# Altium PCB PCB1.PcbDoc
Units mm, origin at the board's own origin, x right, y up, seen from the top; angles counter-clockwise.
Board outline 152.4 x 101.6 mm, 2 copper layers (Top Layer, Bottom Layer); 24 components, 14 nets, 78 pads, 28 vias.
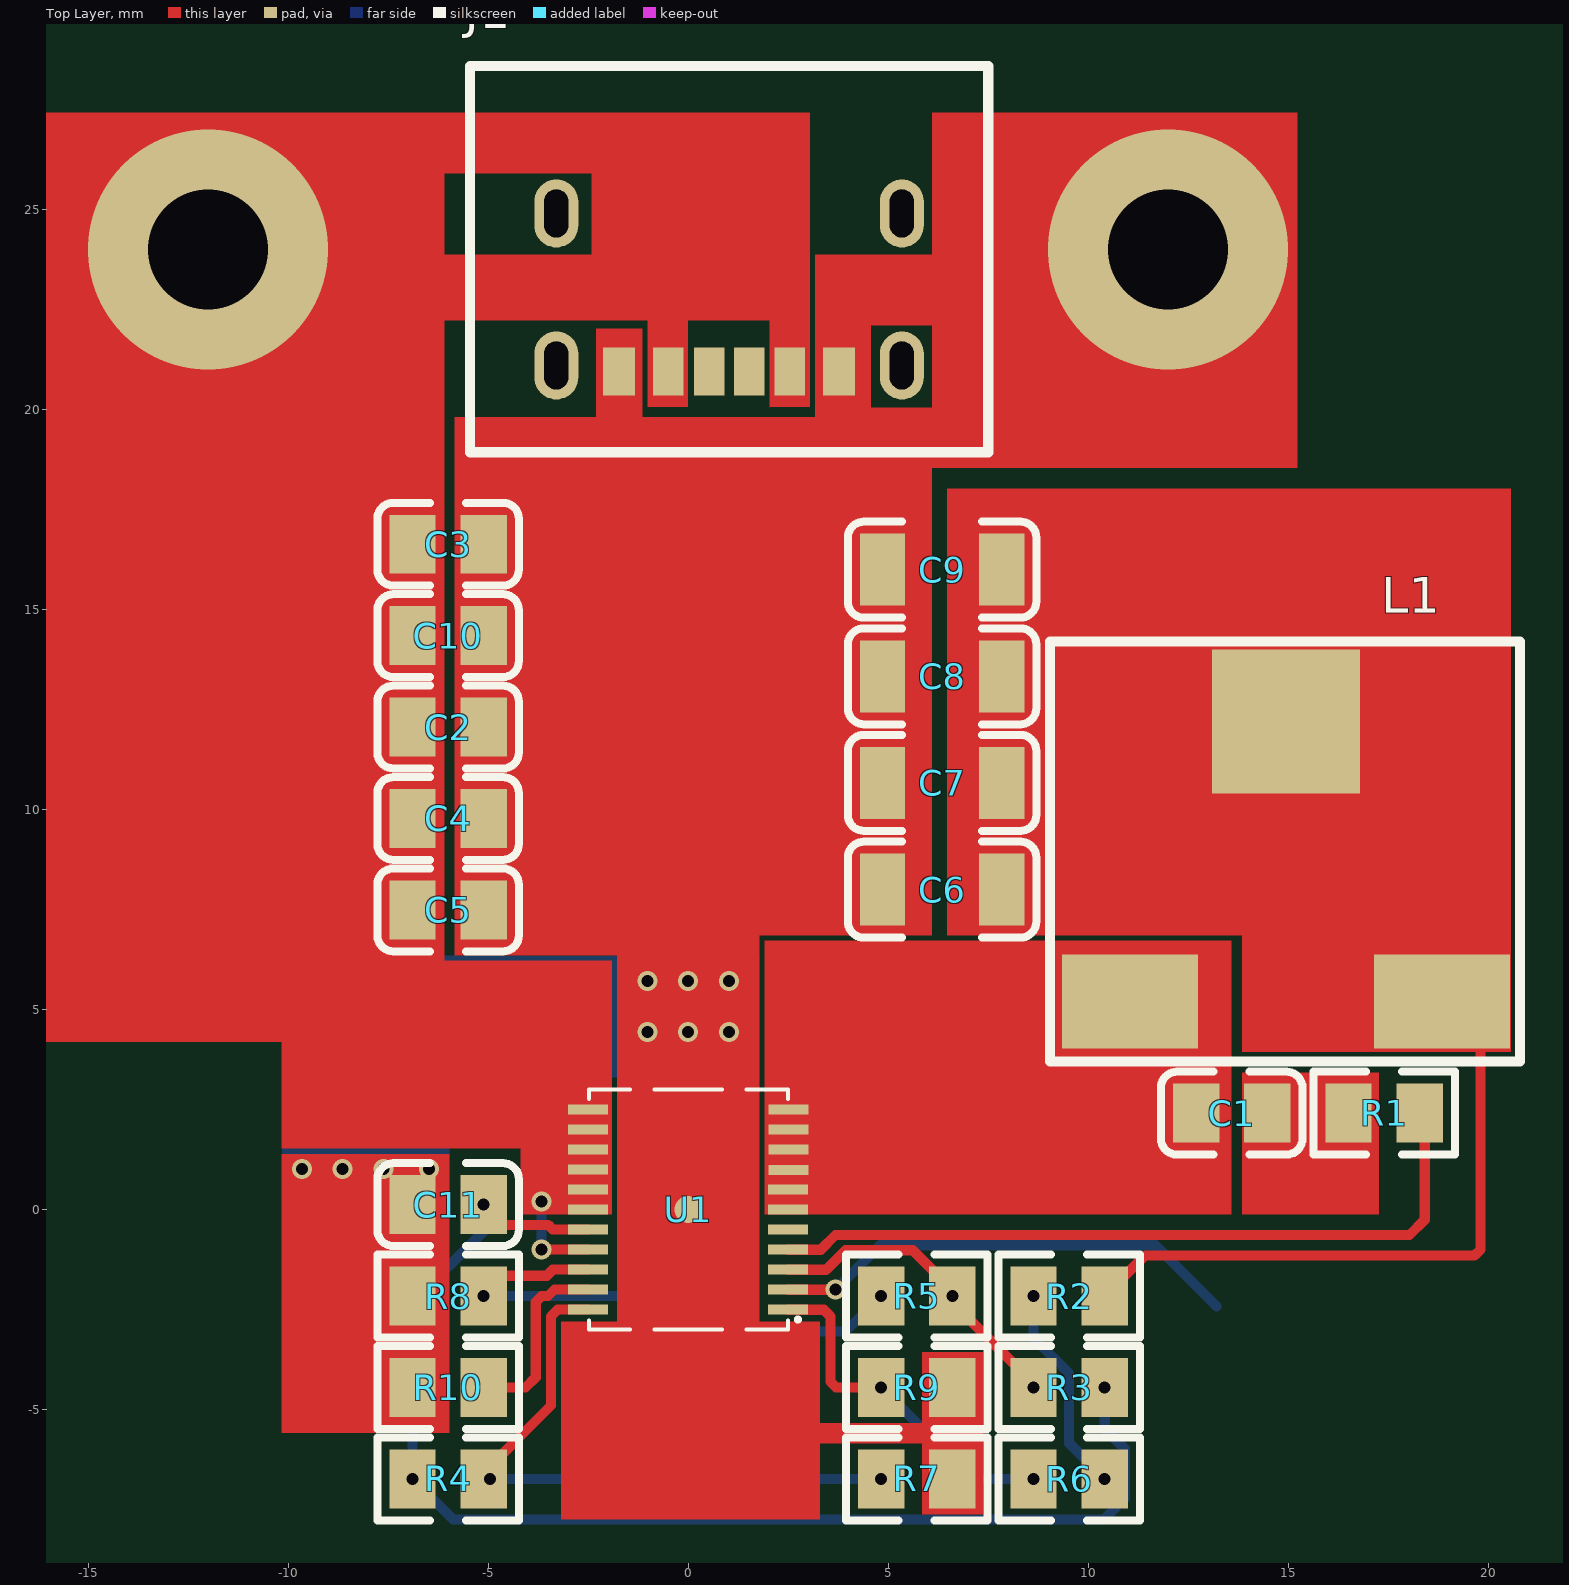
[diagram p0: Top Layer view]
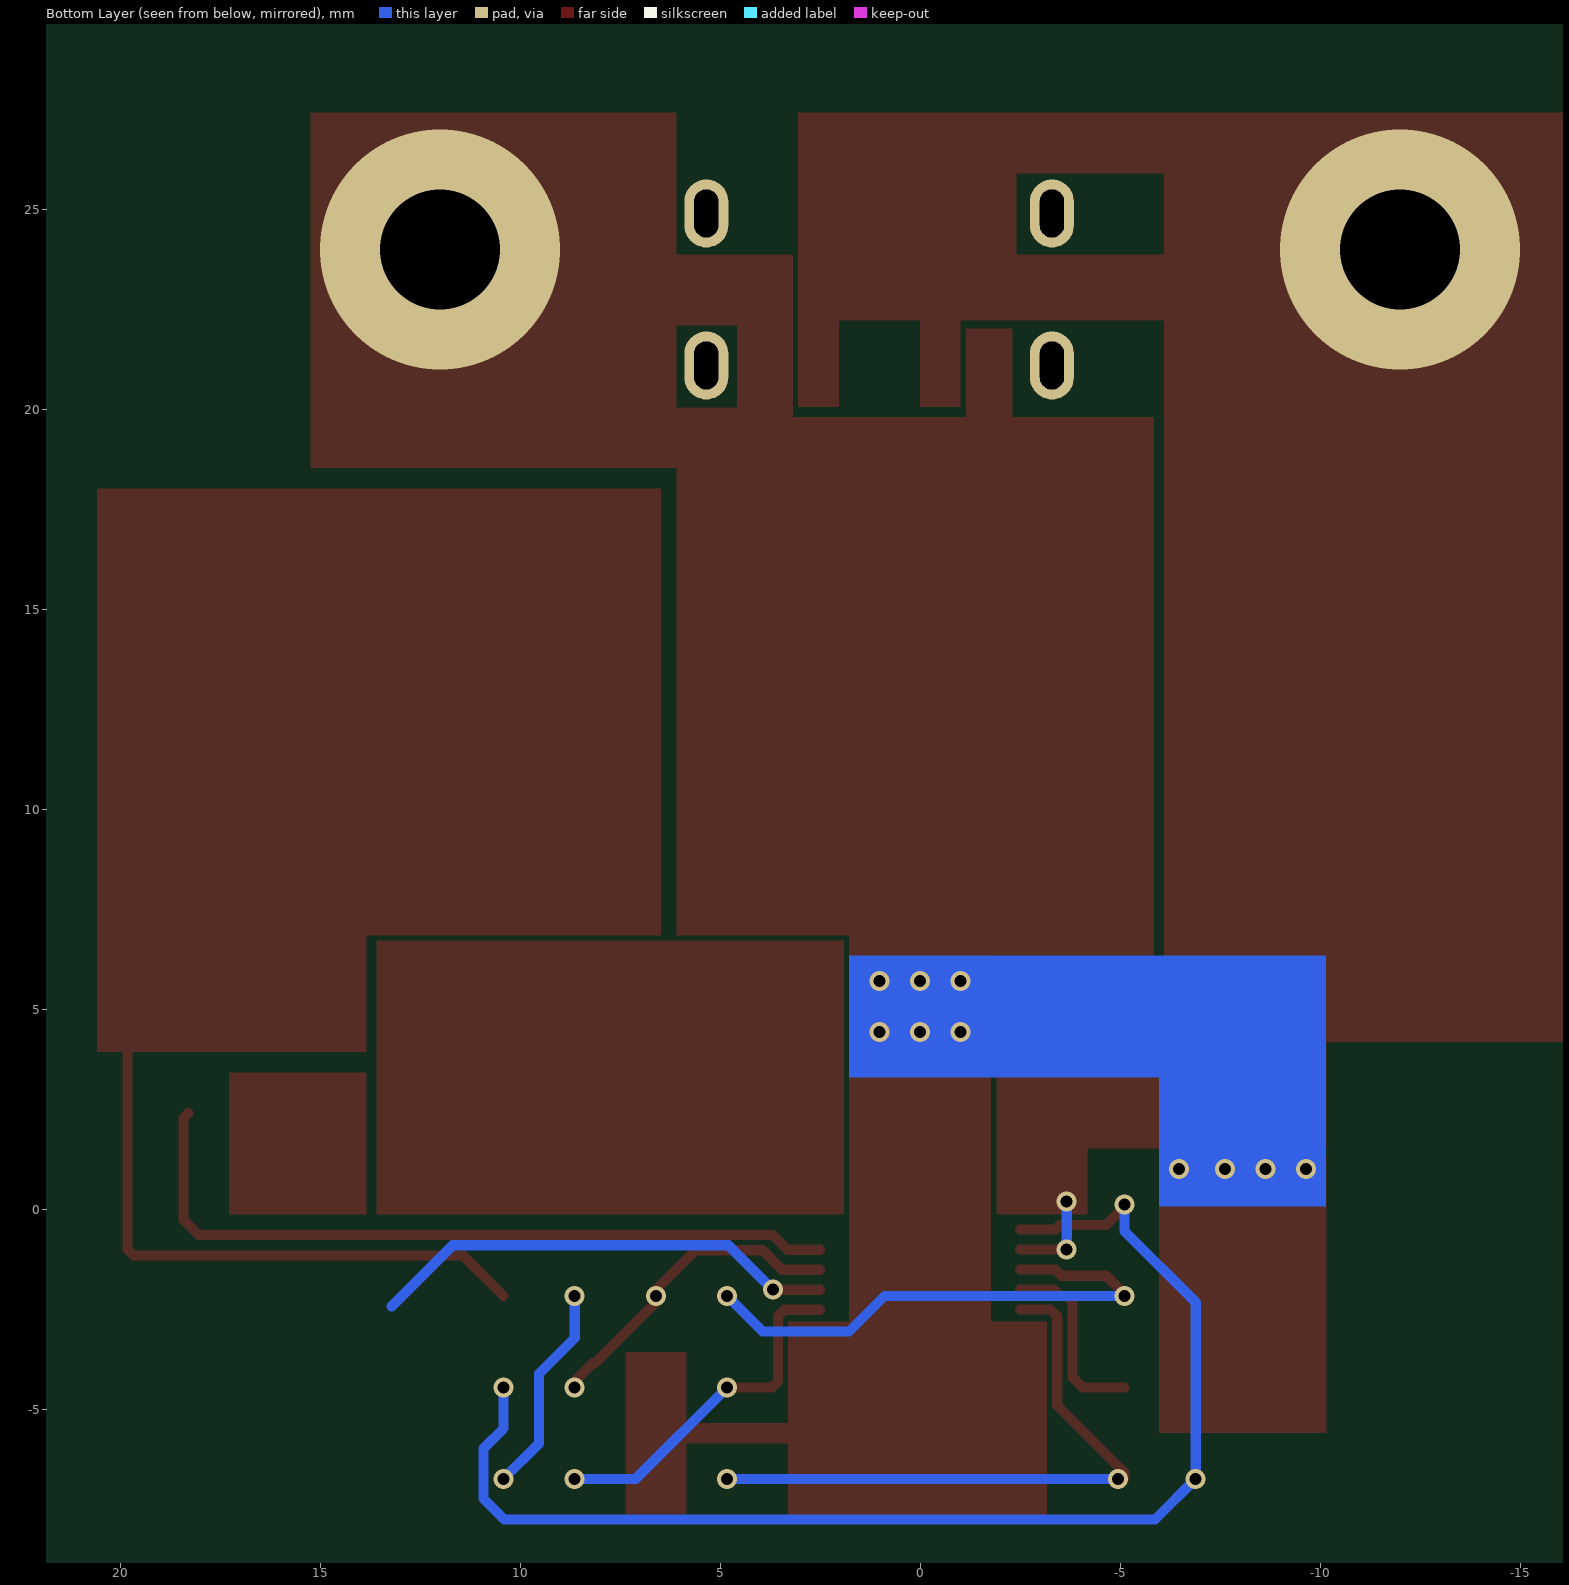
[diagram p1: Bottom Layer view, seen from below]
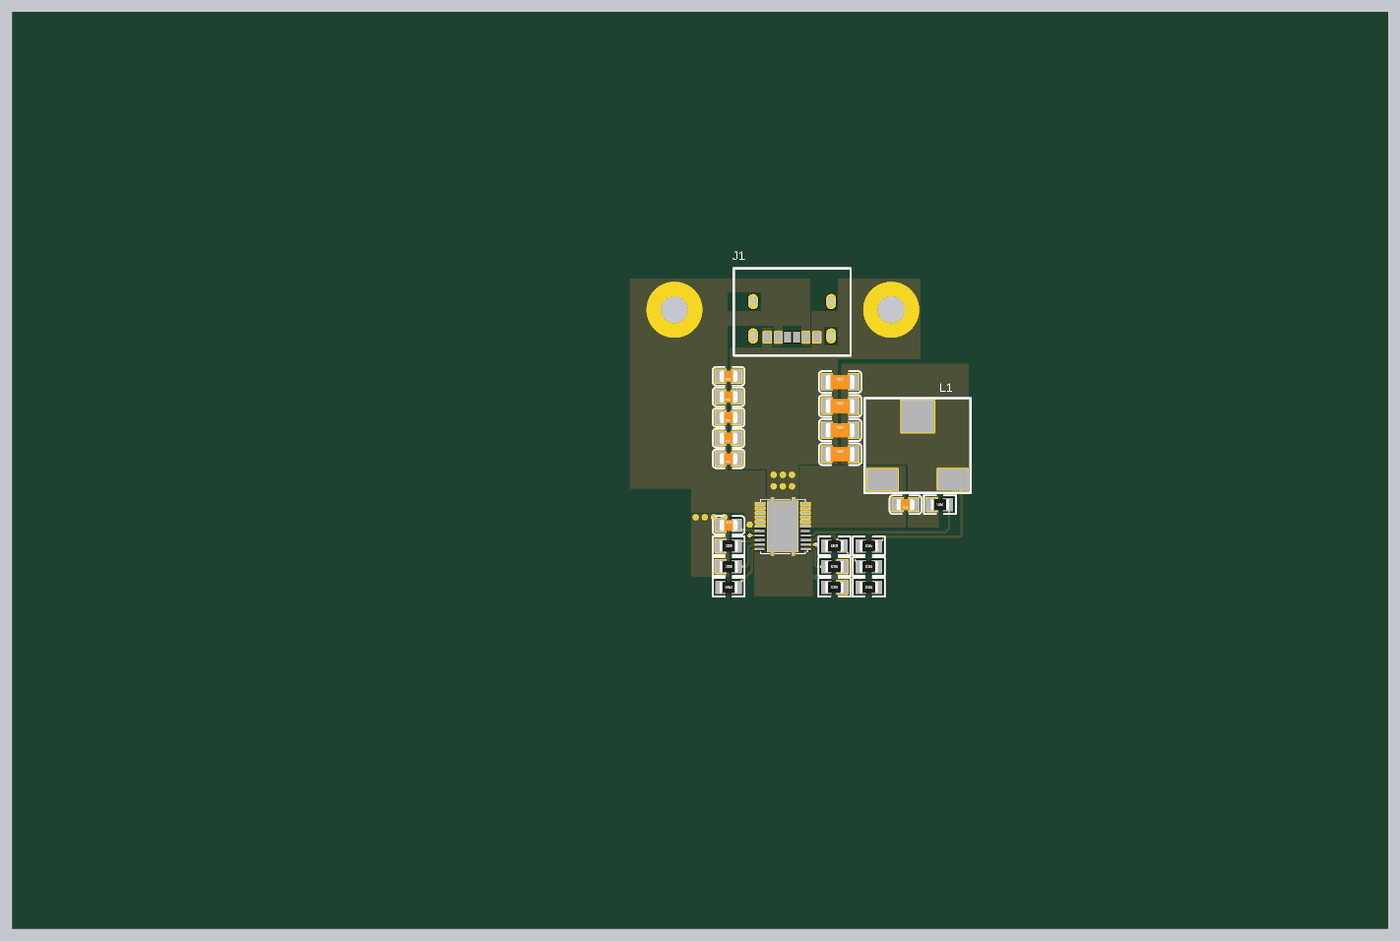
[diagram p2: 3D render of the assembled board from above, using the file's embedded part models]

## Layer stack, top to bottom
Top Solder: solder mask 0.0102, Solder Resist, Dk 3.5
Top Layer: signal copper 0.0356
Dielectric 1: dielectric 0.32, FR-4, Dk 4.8
Bottom Layer: signal copper 0.0356
Bottom Solder: solder mask 0.0102, Solder Resist, Dk 3.5

## Board outline
-85.344,-44.577 67.056,-44.577 67.056,57.023 -85.344,57.023

## Design rules (kind name [scope] priority, off if disabled: settings)
Clearance [All] p1: gap=0.127 ignorepadtopadclearanceinfootprint=FALSE
PolygonConnect [All] p1: connectstyle=Relief reliefconductorwidth=0.254 reliefentries=4 polygonreliefangle="90 Angle" airgapwidth=0.254
RoutingVias [All] p1: holewidth=0.711 width=1.27 viastyle="Through Hole" minholewidth=0.711 minwidth=1.27 maxholewidth=0.711 maxwidth=1.27
SolderMaskExpansion [All] p1: expansion=0.102 istentingtop=FALSE
SupplyNets "Schematic Supply Nets_3" [InNet('1V0')] p1: voltage=0.000
SupplyNets "Schematic Supply Nets_2" [InNet('VIN')] p2: voltage=0.000
SupplyNets "Schematic Supply Nets_1" [InNet('GND')] p3: voltage=0.000
SupplyNets "Schematic Supply Nets" [InNet('VREG')] p4: voltage=0.000
Width [All] p1: maxlimit=25.4 minlimit=0.127 preferedwidth=0.254
30 further rules are at their usual default settings.

## Classes and differential pairs
component class Sheet1: C1 C2 C3 C4 C5 C8 C9 C10 C11 J1 L1 R1 R2 R3 R4 R5 R6 R7 R8 R9 R10 U1

## Components (designator, comment, footprint, x,y, rotation, side; value= is the part's Value field where it differs from the comment)
C1 "100nF" 0805_C 13.589,2.413 r180 top
C2 "22uF" 0805_C -6,12.065 r180 top
C3 "22uF" 0805_C -6,16.637 r180 top
C4 "22uF" 0805_C -6,9.779 r180 top
C5 "22uF" 0805_C -6,7.493 r180 top
C6 "100uF" 1206_C 6.35,8.001 r0 top
C7 "100uF" 1206_C 6.35,10.668 r0 top
C8 "100uF" 1206_C 6.35,13.335 r0 top
C9 "100uF" 1206_C 6.35,16.002 r0 top
C10 "4.7uF" 0805_C -6,14.351 r180 top
C11 "1uF" 0805_C -6,0.127 r0 top
J1 "Type C 6 pin" "USB type C 6pin" 5.344,24.905 r180 top locked
L1 "Inductor" "PCBComponent_1 - duplicate2" 11.049,5.207 r0 top locked value=0.44uH
R1 "2Ω" 0805_R 17.399,2.413 r180 top
R2 "3.3KΩ" 0805_R 9.525,-2.159 r180 top
R3 "100KΩ" 0805_R 9.525,-4.445 r180 top
R4 "NC" 0805_R -6,-6.731 r180 top
R5 "200KΩ" 0805_R 5.714,-2.159 r0 top
R6 "4.7KΩ" 0805_R 9.524,-6.731 r180 top
R7 "NC" 0805_R 5.715,-6.731 r180 top
R8 "39KΩ" 0805_R -6,-2.159 r0 top
R9 "12KΩ" 0805_R 5.714,-4.445 r180 top
R10 "150KΩ" 0805_R -6,-4.445 r0 top
U1 "TPS53355DQPR" LSON-22_L6.0-W5.0-P0.50-BL-EP 0,0 r90 top locked

## Footprints (in the part's own frame and the unit in brackets; to place one, negate y for a bottom-side part, rotate by r counter-clockwise, add the part's x,y. Pads: shape width x height; smd on the part's side, far side on the other; paste and mask are expansions set on the pad)
0805_C [mm]
  rect 1.16x1.47 smd: 1(-0.89,0) 2(0.89,0)
  silkscreen extent -1.77,-1.04 1.77,1.04, body extent -1,-0.62 1,0.63, height 0.77
0805_R [mm]
  rect 1.16x1.47 smd: 1(-0.89,0) 2(0.89,0)
  silkscreen extent -1.77,-1.04 1.77,1.03, body extent -1,-0.62 1,0.63, height 0.49
1206_C [mm]
  rect 1.13x1.8 smd: 1(-1.49,0) 2(1.49,0)
  silkscreen extent -2.36,-1.2 2.35,1.2, body extent -1.6,-0.81 1.6,0.79, height 1
LSON-22_L6.0-W5.0-P0.50-BL-EP [mm]
  rect 0.25x1 smd: 1(-2.502,-2.502) 2(-2.002,-2.502) 3(-1.502,-2.502) 4(-1.002,-2.502) 5(-0.502,-2.502) 6(-0.002,-2.502) 7(0.498,-2.502) 8(0.996,-2.509) 9(1.499,-2.506) 10(1.998,-2.508) 11(2.498,-2.508) 12(2.502,2.509) 13(2.001,2.505) 14(1.501,2.504) 15(1.002,2.504) 16(0.501,2.504) 17(0.002,2.505) 18(-0.498,2.505) 19(-0.998,2.505) 20(-1.5,2.502) 21(-1.998,2.503) 22(-2.498,2.505)
  round 0.68 smd: 23(0.005,0)
  Top Layer region: -2.796,-1.6 -2.796,-1.3 -3.196,-1.3 -3.196,-1 -2.796,-1 -2.796,1 -3.196,1 -3.196,1.3 -2.796,1.3 -2.796,1.7 2.804,1.7 2.804,1.3 3.204,1.3 3.204,1 2.804,1 2.804,-1 3.204,-1 3.204,-1.3 2.804,-1.3 2.804,-1.7 -2.796,-1.7 -2.796,-1.6
  silkscreen extent -3,-2.79 3,2.48
"PCBComponent_1 - duplicate2" [mm] "大电流电感"
  rect 3.7x3.6 smd: 0(3.9,7)
  rect 3.4x2.35 smd: 1(0,0) 2(7.8,0)
  silkscreen extent -2,-1.5 9.75,9
"USB type C 6pin" [mm] "充电用6针接口"
  oval 1.1x1.7 hole 0.6 slot 1.2 at 90 deg: 7(0,3.8) 8(8.64,3.8) 9(0,0) 10(8.64,0)
  rect 0.76x1.2 smd: A5(3.82,3.95) A9(2.8,3.95) B5(4.82,3.95) B9(5.84,3.95)
  rect 0.8x1.2 smd: A12(1.57,3.95) B12(7.07,3.95)
  silkscreen extent -2.16,-3.68 10.79,5.97

## Part data
C1: library part "0805 100nF(104) 10% 50V", "贴片电容", Package=0805, SuppliersPartNumber=C49678, ComponentLink1Description=供应商链接, ComponentLink1URL=http://www.szlcsc.com/product/details_50686.html, Supplier=LC
C2 C3 C4 C5: library part "0805 22uF (226) 20% 25V", "贴片电容", Package=0805, SuppliersPartNumber=C45783, ComponentLink1Description=供应商链接, ComponentLink1URL=http://www.szlcsc.com/product/details_46786.html, Supplier=LC
C6 C7 C8 C9: library part "1206 100nF (104) 10% 50V", "贴片电容", Package=1206, SuppliersPartNumber=C24497, ComponentLink1Description=供应商链接, ComponentLink1URL=http://www.szlcsc.com/product/details_25237.html, Supplier=LC
C10: library part "0805 4.7uF (475) 10% 25V", "贴片电容", Package=0805, SuppliersPartNumber=C1779, ComponentLink1Description=供应商链接, ComponentLink1URL=http://www.szlcsc.com/product/details_2131.html, Supplier=LC
C11: library part "0805 1uF (105) 10% 50V", "贴片电容", Package=0805, SuppliersPartNumber=C28323, ComponentLink1Description=供应商链接, ComponentLink1URL=http://www.szlcsc.com/product/details_29074.html, Supplier=LC
R1: library part "0805 2.2Ω (2R20) 1%", "贴片电阻", Package=0805, SuppliersPartNumber=C17521, ComponentLink1Description=供应商链接, ComponentLink1URL=http://www.szlcsc.com/product/details_18209.html, Supplier=LC
R2: library part "0805 3.3KΩ (3301) 1%", "贴片电阻", Package=0805, SuppliersPartNumber=C26010, ComponentLink1Description=供应商链接, ComponentLink1URL=http://www.szlcsc.com/product/details_26753.html, Supplier=LC
R3: library part "0805 100KΩ (1003) 1%", "贴片电阻", Package=0805, SuppliersPartNumber=C17407, ComponentLink1Description=供应商链接, ComponentLink1URL=http://www.szlcsc.com/product/details_18095.html, Supplier=LC
R4 R7 R8: library part "0805 39KΩ (3902) 1%", "贴片电阻", Package=0805, SuppliersPartNumber=C25826, ComponentLink1Description=供应商链接, ComponentLink1URL=http://www.szlcsc.com/product/details_26569.html, Supplier=LC
R5: library part "0805 200KΩ (2003) 1%", "贴片电阻", Package=0805, SuppliersPartNumber=C17539, ComponentLink1Description=供应商链接, ComponentLink1URL=http://www.szlcsc.com/product/details_18227.html, Supplier=LC
R6: library part "0805 4.7KΩ (4701) 1%", "贴片电阻", Package=0805, SuppliersPartNumber=C17673, ComponentLink1Description=供应商链接, ComponentLink1URL=http://www.szlcsc.com/product/details_18361.html, Supplier=LC
R9: library part "0805 12KΩ (1202) 1%", "贴片电阻", Package=0805, SuppliersPartNumber=C17444, ComponentLink1Description=供应商链接, ComponentLink1URL=http://www.szlcsc.com/product/details_18132.html, Supplier=LC
R10: library part "0805 150KΩ (1503) 1%", "贴片电阻", Package=0805, SuppliersPartNumber=C17470, ComponentLink1Description=供应商链接, ComponentLink1URL=http://www.szlcsc.com/product/details_18158.html, Supplier=LC
U1: "具有 Eco-mode 的 TPS53355 1.5V 至 15V 输入（4.5V 至 25V 偏置）、 / 30A 同步降压 SWIFT™ / 转换器™", Frequency - Switching=1MHz, JLCPCB Part Class="Extended Part", LCSC Part Name=30A同步降压转换器, Manufacturer=TI(德州仪器), Operating Temperature=-40℃~+125℃, Output Current=30A, Output Voltage=600mV~5.5V, Quiescent Current=-, Voltage - Supply=1.5V~15V, Add into BOM=yes, Convert to PCB=yes, Datasheet=https://item.szlcsc.com/datasheet/TPS53355DQPR/159505.html, Device=TPS53355DQPR, Function=降压型, Manufacturer Part=TPS53355DQPR, Number of Outputs=1, Output Type=可调, Supplier=LCSC, Supplier Footprint=LSON-22-EP(5x6), Supplier Part=C148172, Switch tube (built-in/external)=内置, Symbol=TPS53355DQPR, Synchronous Rectifier=是, Topology=降压式
L1: Code_IEC=1005, Code_JEITA=0402, LatestRevisionDate=29-May-2009, LatestRevisionNote="IPC-7351 Footprint Added.", PackageDescription="Chip Inductor", PackageReference=0402-A, Published=8-Jun-2000, Publisher="Altium Limited"

## Via types
v1: diameter 0.5, hole 0.3, Top Layer to Bottom Layer, 26 vias
v2: diameter 6, hole 3, Top Layer to Bottom Layer, 2 vias

## Nets (pads, with @x,y where several pads share a name; then routed paths per layer and width w, separated by ;. In a path a pad name is that pad's centre, name@x,y a point inside that pad or via, vN(x,y) a via of type N, cw(c..) or ccw(c..) an arc to the next point about the centre after c; other vN are vias at no path point)
1V0: C6.2 C7.2 C8.2 C9.2 L1.0 L1.2 R2.1 | length 16.5
  Top Layer w0.254: R2.1 11.431,-1.143 19.663,-1.143 19.812,-0.994 19.812,4.244 L1.2
EN: U1.2 | length 11.8
  Top Layer w0.254: U1.2 v1@3.653,-2.002
  Bottom Layer w0.254: v1(3.683,-2.002) 4.796,-0.889 11.684,-0.889 13.208,-2.413
FB: R6.2 R9.2 U1.1 | length 8.8
  Top Layer w0.254: U1.1 3.391,-2.502 3.556,-2.667 3.556,-4.296 3.705,-4.445 v1(4.824,-4.445)
  Bottom Layer w0.254: v1(4.824,-4.445) 7.11,-6.731 v1(8.634,-6.731)
GND: C2.1 C3.1 C4.1 C5.1 C6.1 C7.1 C8.1 C9.1 C10.1 C11.1 J1.A12 J1.B12 R7.1 R8.1 R9.1 R10.1 U1.23 | length 2.3
  Top Layer w0.254: R9.1 R7.1 R7.1
  other v1: -9.652,1.016 -8.636,1.016 -7.62,1.016 -6.477,1.016 -1.016,4.445 0,4.445 1.016,4.445 -1.016,5.715 0,5.715 1.016,5.715
  other v2: 12,24
LL: C1.2 L1.1 U1.6 U1.7 U1.8 U1.9 U1.10 U1.11
MODE: R5.1 R8.2 U1.20 | length 13.6
  Top Layer w0.254: v1(-5.11,-2.159) -5.11,-2.104 -4.657,-1.651 -3.534,-1.651 -3.383,-1.5 U1.20
  Bottom Layer w0.254: v1(-5.11,-2.159) 0.889,-2.159 1.778,-3.048 3.935,-3.048 v1(4.824,-2.159)
NetC1_1: C1.1 R1.2
NetR2_2: R2.2 R6.1 | length 5.3
  Bottom Layer w0.254: v1(8.635,-2.159) 8.635,-3.208 9.525,-4.098 9.525,-5.842 v1(10.414,-6.731)
PG: R3.2 R5.2 U1.3 | length 8
  Top Layer w0.254: U1.3 3.451,-1.502 3.937,-1.016 5.616,-1.016 6.604,-2.004 v1(6.604,-2.159) 6.604,-2.314 8.127,-3.837 8.182,-3.837 8.635,-4.29 v1(8.635,-4.445)
RF: R4.1 R7.2 U1.22 | length 15.5
  Top Layer w0.254: R4.1 -5.11,-6.576 -3.429,-4.895 -3.429,-2.667 -3.26,-2.498 U1.22
  Bottom Layer w0.254: v1(-4.953,-6.731) v1(4.825,-6.731)
TRIP: R10.2 U1.21 | length 4.7
  Top Layer w0.254: R10.2 -4.064,-4.445 -3.81,-4.191 -3.81,-2.308 -3.661,-2.159 -3.503,-2.159 -3.342,-1.998 U1.21
VBST: R1.1 U1.4 | length 18.9
  Top Layer w0.254: U1.4 3.316,-1.002 3.683,-0.635 18.034,-0.635 18.415,-0.254 18.415,2.287 R1.1
VIN: C2.2 C3.2 C4.2 C5.2 C10.2 J1.A9 J1.B9 U1.12 U1.13 U1.14 U1.15 U1.16 U1.17 U1.19 | length 2.4
  Top Layer w0.254: v1(-3.665,-0.998) U1.19
  Bottom Layer w0.254: v1(-3.665,-0.998) v1(-3.665,0.2)
  other v2: -12,24
VREG: C11.2 R3.1 R4.2 U1.18 | length 31.9
  Top Layer w0.254: v1(-5.11,0.127) -5.11,0.072 -4.657,-0.381 -3.501,-0.381 -3.386,-0.496 -2.507,-0.496 U1.18
  Bottom Layer w0.254: v1(-5.11,0.127) -5.11,-0.538 -6.89,-2.318 v1(-6.89,-6.731) -5.874,-7.747 10.392,-7.747 10.918,-7.221 10.918,-5.977 10.415,-5.474 v1(10.415,-4.445)
pads on no net: J1.7 J1.8 J1.9 J1.10 J1.A5 J1.B5 U1.5

## Other copper
Top Layer:
  rectangle net GND: -5.842,17.653 3.556,19.812
  rectangle net VIN: -6.731,22.225 3.048,23.876
  rectangle net VIN: -2.413,23.622 3.048,26.67
  rectangle net VIN: -6.35,25.908 3.048,27.432
  rectangle net GND: 4.365,17.653 6.096,18.796
  rectangle net GND: 6.096,18.542 15.24,27.432
  rectangle net GND: 4.365,18.542 15.24,20.058
  rectangle net GND: 4.191,22.098 11.811,23.876
  rectangle net GND: 3.175,16.891 4.572,23.876
  rectangle net GND: -2.305,17.399 -1.143,22.026
  rectangle net VIN: 2.032,20.066 3.048,22.987
  rectangle net VIN: -1.016,20.066 0,22.86
  rectangle net GND: -3.175,-7.747 -1.7,-2.796
  rectangle net GND: 1.143,-7.747 3.302,-2.794
  rectangle net GND: -10.16,-5.588 -5.969,1.397
  rectangle net GND: 1.143,-5.842 7.112,-5.336
  rectangle net GND: 5.842,-7.62 7.366,-3.556
  rectangle net VIN: -10.16,1.524 -1.905,6.223
  rectangle net VIN: -16.891,4.191 -6.096,27.432
  rectangle net GND: -5.842,6.35 1.397,18.034
  rectangle net NetC1_1: 13.843,-0.127 17.272,3.429
  rectangle net GND: 1.016,6.858 6.096,18.034
  rectangle net 1V0: 13.843,3.937 20.574,18.034
  rectangle net 1V0: 6.477,6.858 16.256,18.034
  rectangle net LL: 1.907,-0.127 13.589,6.731
  rectangle net VIN: -4.191,-0.127 -1.905,6.223
  rectangle net GND: -1.778,-7.747 1.778,15.748
Bottom Layer:
  rectangle net GND: -10.151,3.302 1.778,6.35
  rectangle net GND: -10.151,0.075 -5.969,6.35